# Altium PCB BattBastion_2layer.PcbDoc (part 2 of 2)
Units mm, origin at the board's own origin, x right, y up, seen from the top; angles counter-clockwise.
Board outline 51.31 x 36.45 mm, 2 copper layers (Top Layer, Bottom Layer); 74 components, 42 nets, 277 pads, 438 vias.
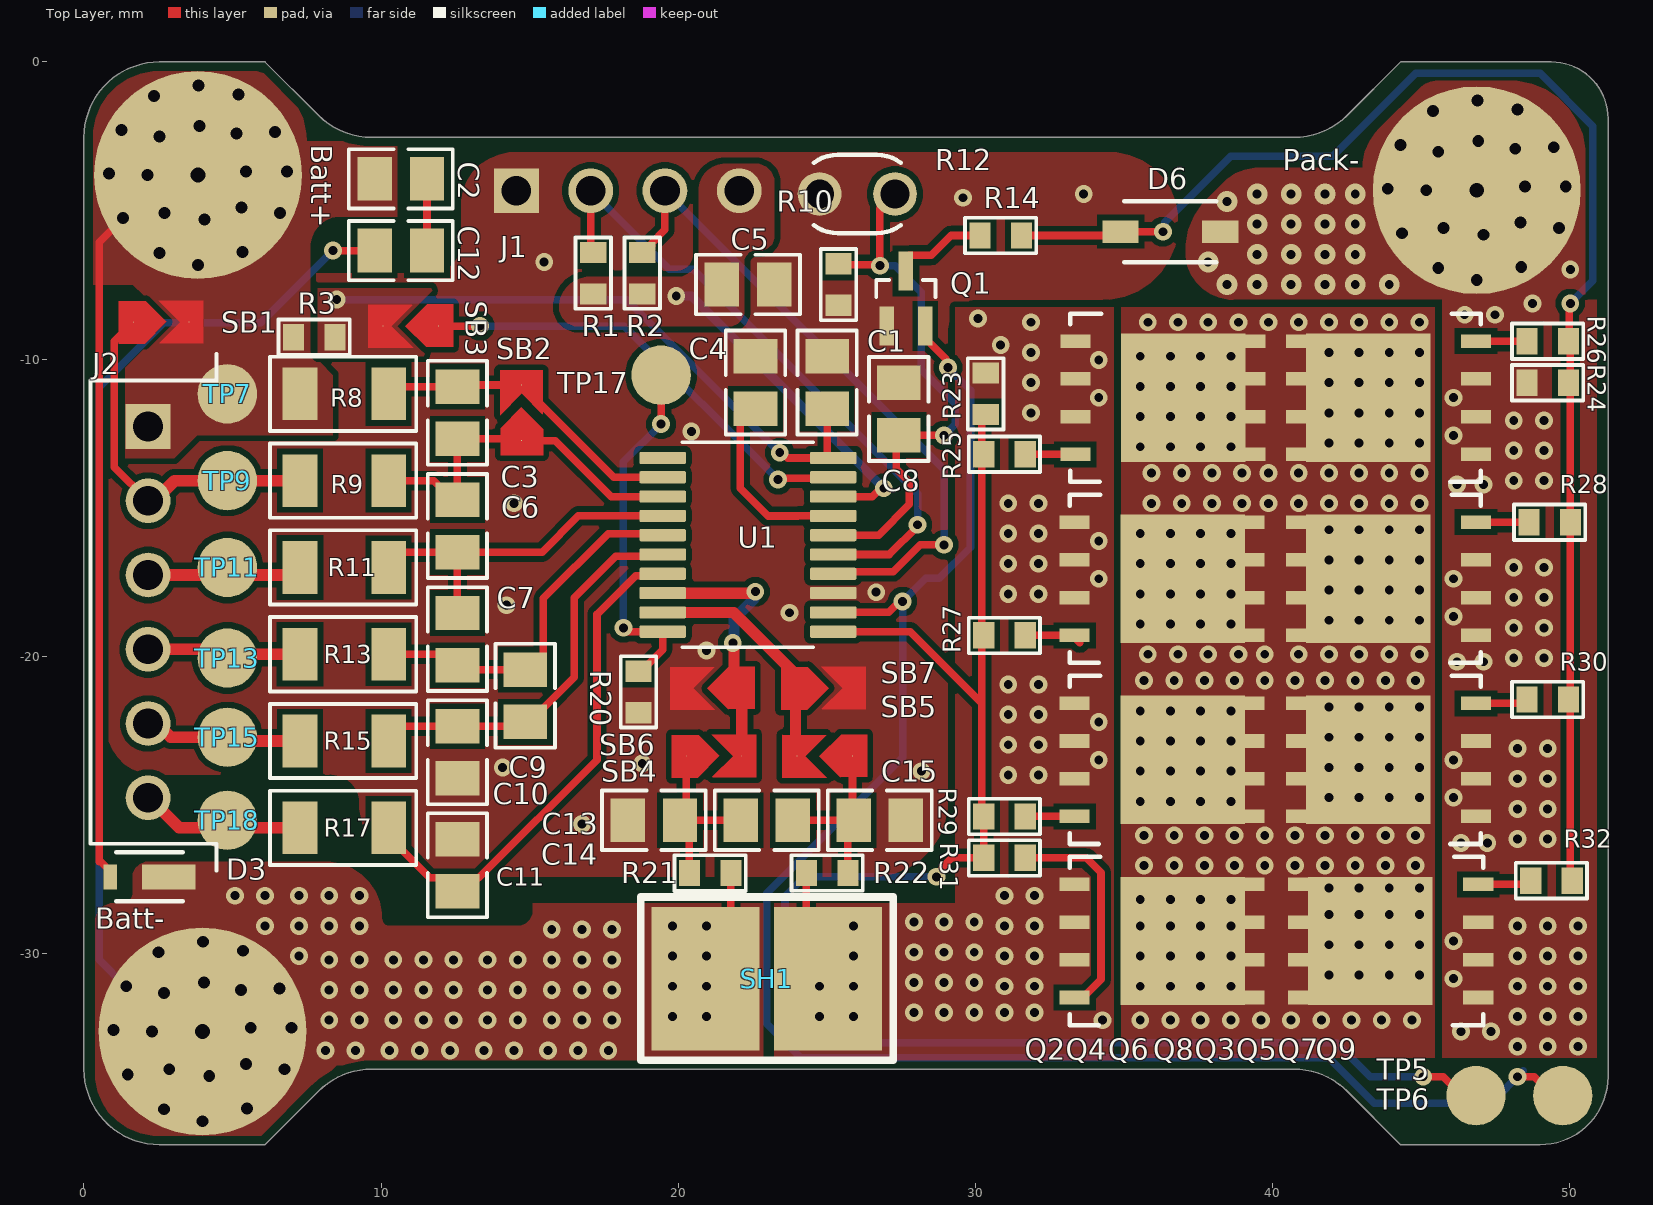
[diagram p0: Top Layer view]

## Part data (continued)
R14: library part "1 kOhms 0603", "Fixed Resistor, Metal Glaze/thick Film, 0.1W, 1000ohm, 75V, 5% +/-Tol, 200ppm/Cel, Surface Mount, 0603", Case/Package=0603, Manufacturer=Bourns, Manufacturer Part Number=CR0603-JW-102ELF, Max Operating Temperature=155°C, Min Operating Temperature=-55°C, Package Height=0.45mm, Package Length=1.6mm, Package Shape=Rectangular, Package Width=0.8mm, Power=100mW, Rated Temperature=70°C, Resistor Type="FIXED RESISTOR", Temperature Coefficient (ppm/Cel)=200, Tolerance=5%, Working Voltage=50V, Category="Chip SMD Resistors", ComponentLink1Description=https://datasheet.ciiva.com:443/pdfs/VipMasterIC/IC/BOUR/BOUR-S-A0009069624/BOUR-S-A0009069624-1.pdf?src-supplier=IHS+Markit, ComponentLink1URL=https://datasheet.ciiva.com:443/pdfs/VipMasterIC/IC/BOUR/BOUR-S-A0009069624/BOUR-S-A0009069624-1.pdf?src-supplier=IHS+Markit, ComponentLink2Description=https://datasheet.ciiva.com/7986/1902866-7986188.pdf?src-supplier=Element14, ComponentLink2URL=https://datasheet.ciiva.com/7986/1902866-7986188.pdf?src-supplier=Element14, ComponentLink3Description=https://datasheet.ciiva.com/46383/691949-46383788.pdf?src-supplier=Element14, ComponentLink3URL=https://datasheet.ciiva.com/46383/691949-46383788.pdf?src-supplier=Element14, ComponentLink4Description=https://datasheet.ciiva.com/16757/70154685-16757477.pdf?src-supplier=Allied+Electronics, ComponentLink4URL=https://datasheet.ciiva.com/16757/70154685-16757477.pdf?src-supplier=Allied+Electronics, ComponentLink5Description=https://datasheet.ciiva.com/9123/chpreztr-9123706.pdf?src-supplier=Avnet, ComponentLink5URL=https://datasheet.ciiva.com/9123/chpreztr-9123706.pdf?src-supplier=Avnet, ComponentLink6Description=https://datasheet.ciiva.com/6564/chpreztr-6564439.pdf?src-supplier=Digikey, ComponentLink6URL=https://datasheet.ciiva.com/6564/chpreztr-6564439.pdf?src-supplier=Digikey, ComponentLink7Description=https://datasheet.ciiva.com/6564/chpreztr-6564441.pdf?src-supplier=Digikey, ComponentLink7URL=https://datasheet.ciiva.com/6564/chpreztr-6564441.pdf?src-supplier=Digikey, Construction=Chip, JESD-609 Code=e3, Mounting Technology="Surface Mount", Packaging="Tape and Reel", Pins=2, Pricing="5000=0.00196, 10000=0.00195, 20000=0.00194, 30000=0.00193, 40000=0.00192 (USD)", Reach SVHC Compliant=Yes, RoHS=Yes, RoHS Compliant=Yes, Stock=15000, Supplier=Avnet, Supplier Part Number=CR0603-JW-102ELF, Technology="RUTHENIUM OXIDE", Terminal Finish=Nickel, Termination=Wraparound
R20: library part "750 kOhms 0603", "Res Thick Film 0603 750K Ohm 1% 1/10W ±100ppm/°C Molded SMD Punched Carrier T/R", Case Code (Imperial)=0603, Manufacturer=Panasonic, Manufacturer Part Number=ERJ-3EKF7503V, Max Operating Temperature=155°C, Max Power Dissipation=100mW, Min Operating Temperature=-55°C, Temperature Coefficient=100ppm/°C, Tolerance=1%, Voltage Rating=75V, Case/Package=0603, Category="Chip SMD Resistors", China RoHS=Non-Compliant, ComponentLink1Description=https://datasheet.octopart.com:443/ERJ3EKF7503V-Panasonic-datasheet-182147282.pdf?src-supplier=IHS, ComponentLink1URL=https://datasheet.octopart.com:443/ERJ3EKF7503V-Panasonic-datasheet-182147282.pdf?src-supplier=IHS, ComponentLink2Description=https://datasheet.octopart.com:443/ERJ-3EKF7503V-Panasonic-datasheet-13266541.pdf?src-supplier=RS+(Formerly+Allied+Electronics), ComponentLink2URL=https://datasheet.octopart.com:443/ERJ-3EKF7503V-Panasonic-datasheet-13266541.pdf?src-supplier=RS+(Formerly+Allied+Electronics), ComponentLink3Description=https://datasheet.octopart.com:443/ERJ-3EKF7503V-Panasonic-datasheet-48891056.pdf?src-supplier=Newark, ComponentLink3URL=https://datasheet.octopart.com:443/ERJ-3EKF7503V-Panasonic-datasheet-48891056.pdf?src-supplier=Newark, ComponentLink4Description=https://datasheet.octopart.com:443/ERJ-3EKF7503V-Panasonic-datasheet-168681906.pdf?src-supplier=Farnell, ComponentLink4URL=https://datasheet.octopart.com:443/ERJ-3EKF7503V-Panasonic-datasheet-168681906.pdf?src-supplier=Farnell, ComponentLink5Description=https://datasheet.octopart.com:443/ERJ-3EKF7503V-Panasonic-datasheet-136608610.pdf?src-supplier=Farnell, ComponentLink5URL=https://datasheet.octopart.com:443/ERJ-3EKF7503V-Panasonic-datasheet-136608610.pdf?src-supplier=Farnell, ComponentLink6Description=https://datasheet.octopart.com:443/ERJ-3EKF7503V-Panasonic---ECG-datasheet-10025800.pdf?src-supplier=Farnell, ComponentLink6URL=https://datasheet.octopart.com:443/ERJ-3EKF7503V-Panasonic---ECG-datasheet-10025800.pdf?src-supplier=Farnell, ComponentLink7Description=https://datasheet.octopart.com:443/ERJ-3EKF7503V-Panasonic---ECG-datasheet-8853621.pdf?src-supplier=Farnell, ComponentLink7URL=https://datasheet.octopart.com:443/ERJ-3EKF7503V-Panasonic---ECG-datasheet-8853621.pdf?src-supplier=Farnell, ComponentLink8Description=https://datasheet.octopart.com:443/ERJ-3EKF7503V-Panasonic---ECG-datasheet-15994758.pdf?src-supplier=Farnell, ComponentLink8URL=https://datasheet.octopart.com:443/ERJ-3EKF7503V-Panasonic---ECG-datasheet-15994758.pdf?src-supplier=Farnell, ComponentLink9Description=https://datasheet.octopart.com:443/ERJ-3EKF7503V-Panasonic-datasheet-5313456.pdf?src-supplier=element14+APAC, ComponentLink9URL=https://datasheet.octopart.com:443/ERJ-3EKF7503V-Panasonic-datasheet-5313456.pdf?src-supplier=element14+APAC, ComponentLink10Description=https://datasheet.octopart.com:443/ERJ-3EKF7503V-Panasonic-datasheet-154766169.pdf?src-supplier=Master+Electronics, ComponentLink10URL=https://datasheet.octopart.com:443/ERJ-3EKF7503V-Panasonic-datasheet-154766169.pdf?src-supplier=Master+Electronics, ComponentLink11Description=https://datasheet.octopart.com:443/ERJ3EKF7503V-Panasonic-datasheet-138819429.pdf?src-supplier=Burklin+Elektronik, ComponentLink11URL=https://datasheet.octopart.com:443/ERJ3EKF7503V-Panasonic-datasheet-138819429.pdf?src-supplier=Burklin+Elektronik, ComponentLink12Description=https://datasheet.octopart.com:443/ERJ-3EKF7503V-Panasonic-datasheet-82288794.pdf?src-supplier=Panasonic+SCT, ComponentLink12URL=https://datasheet.octopart.com:443/ERJ-3EKF7503V-Panasonic-datasheet-82288794.pdf?src-supplier=Panasonic+SCT, ComponentLink13Description=https://datasheet.octopart.com/ERJ-3EKF7503V-Panasonic-datasheet-78375410.pdf, ComponentLink13URL=https://datasheet.octopart.com/ERJ-3EKF7503V-Panasonic-datasheet-78375410.pdf, ComponentLink14Description=https://datasheet.octopart.com:443/ERJ-3EKF7503V-Panasonic-datasheet-118621.pdf?src-supplier=DigiKey, ComponentLink14URL=https://datasheet.octopart.com:443/ERJ-3EKF7503V-Panasonic-datasheet-118621.pdf?src-supplier=DigiKey, ComponentLink15Description=https://datasheet.octopart.com:443/ERJ-3EKF7503V-Panasonic-datasheet-41391857.pdf?src-supplier=Electro+Sonic, ComponentLink15URL=https://datasheet.octopart.com:443/ERJ-3EKF7503V-Panasonic-datasheet-41391857.pdf?src-supplier=Electro+Sonic, ComponentLink16Description=https://datasheet.octopart.com:443/ERJ-3EKF7503V-Panasonic-datasheet-38423196.pdf?src-supplier=Future+Electronics, ComponentLink16URL=https://datasheet.octopart.com:443/ERJ-3EKF7503V-Panasonic-datasheet-38423196.pdf?src-supplier=Future+Electronics, Composition="Thick Film", Contact Plating=Tin, Depth=800µm, Features="Automotive AEC-Q200", Height=450µm, Lead Free="Lead Free", Length=1.6mm, Lifecycle Status=Production, Military Standard=Not, Mounting Technology="Surface Mount", Number of Terminals=2, Number of Terminations=2, Packaging="Cut Tape", Power Dissipation=100mW, Power Rating=100mW, Pricing="1=0.057, 10=0.012, 25=0.012, 100=0.007, 250=0.007, 500=0.006, 1000=0.005, 3000=0.005, 6000=0.004, 15000=0.004, 30000=0.003 (USD)", Radiation Hardening=No, REACH SVHC=Yes, RoHS=Compliant, Schedule B="8533210045, 8533210045|8533210045, 8533210045|8533210045|8533210045, 8533210045|8533210045|8533210045|8533210045", Stock=45236, Supplier="Arrow Electronics", Supplier Part Number=ERJ-3EKF7503V, Termination=SMD/SMT, Width=800µm, Working Voltage=75V
R23 R24: "Res Thick Film 0603 1M Ohm 1% 1/10W ±100ppm/°C Molded SMD Paper T/R", Case Code (Imperial)=0603, Case Code (Metric)=1608, Manufacturer=Yageo, Manufacturer Part Number=RC0603FR-071ML, Max Operating Temperature=155°C, Min Operating Temperature=-55°C, Package Quantity=5000, Power Rating=100mW, Supplier Part Number=2912863, Temperature Coefficient=100ppm/°C, Tolerance=1%, Voltage Rating=75V, Application(s)="HIGH RELIABILITY", Category="Chip SMD Resistors", ComponentLink1Description=https://datasheet.ciiva.com/11819/0900766b80f96399-11819295.pdf?src-supplier=Rs, ComponentLink1URL=https://datasheet.ciiva.com/11819/0900766b80f96399-11819295.pdf?src-supplier=Rs, ComponentLink2Description=https://datasheet.ciiva.com/7983/443971-7983614.pdf?src-supplier=Element14, ComponentLink2URL=https://datasheet.ciiva.com/7983/443971-7983614.pdf?src-supplier=Element14, ComponentLink3Description=https://datasheet.ciiva.com/12555/rc0603-272842-12555388.pdf?src-supplier=Mouser, ComponentLink3URL=https://datasheet.ciiva.com/12555/rc0603-272842-12555388.pdf?src-supplier=Mouser, Diameter=10mm, Height=0.45mm, Lead Free=5697LeadFree, Lead Pitch=5mm, Length=1.6mm, Packaging="Cut Tape", Pricing="5000=0.0009, 50000=0.0008, 150000=0.0008, 375000=0.0008, 1000000=0.0008 (USD)", Radiation Hardening=5898YesNo, RoHS=Yes, RoHS Compliant=Yes, Series=RC, Stock=1005000, Supplier="Future Electronics", Technology="THICK FILM", Termination=SMD/SMT, Type="General Purpose", Weight=0.000847oz, Width=0.8mm
SH1: library part "1mOhms CSR", "Res Metal Strip 2818 0.001 Ohm 1% 10W ±200ppm/C Pad SMD Automotive T/R", Case/Package=2818, Manufacturer=Vishay, Manufacturer Part Number=WSHP28181L000FEB, Max Operating Temperature=170°C, Min Operating Temperature=-65°C, Supplier Part Number=WSHP28181L000FEA, Temperature Coefficient=200ppm/°C, Tolerance=1%, Working Voltage=100mV, Category="Chip SMD Resistors", ComponentLink1Description=https://datasheet.octopart.com:443/WSHP28181L000FEB-Vishay-datasheet-175423646.pdf?src-supplier=IHS, ComponentLink1URL=https://datasheet.octopart.com:443/WSHP28181L000FEB-Vishay-datasheet-175423646.pdf?src-supplier=IHS, ComponentLink2Description=https://datasheet.octopart.com:443/WSHP28181L000FEB-Vishay-datasheet-169394530.pdf?src-supplier=IHS, ComponentLink2URL=https://datasheet.octopart.com:443/WSHP28181L000FEB-Vishay-datasheet-169394530.pdf?src-supplier=IHS, ComponentLink3Description=https://datasheet.octopart.com:443/WSHP28181L000FEA-Vishay-datasheet-104525430.pdf?src-supplier=Upverter, ComponentLink3URL=https://datasheet.octopart.com:443/WSHP28181L000FEA-Vishay-datasheet-104525430.pdf?src-supplier=Upverter, ComponentLink4Description=https://datasheet.octopart.com:443/WSHP28181L000FEB-Vishay-datasheet-76801956.pdf?src-supplier=element14+APAC, ComponentLink4URL=https://datasheet.octopart.com:443/WSHP28181L000FEB-Vishay-datasheet-76801956.pdf?src-supplier=element14+APAC, ComponentLink5Description=http://sigma.octopart.com:80/rohs_statement/Vishay-company-15.pdf?src-supplier=Compliance+Statements, ComponentLink5URL=http://sigma.octopart.com:80/rohs_statement/Vishay-company-15.pdf?src-supplier=Compliance+Statements, Composition="Metal Element", Height=1.5mm, Lifecycle Status=Production, Mounting Technology="Surface Mount", Number of Terminals=2, Packaging=Bulk, Power Dissipation=10W, Power Rating=10W, Pricing="3500=1.04104, 7000=1.00048, 14000=0.95992, 21000=0.91936, 28000=0.90246 (USD)", RoHS=Compliant, Schedule B="8533210045, 8533210045|8533210045|8533210045|8533210045|8533210045|8533210045|8533210045|8533210045|8533210045|8533210045|8533210045|8533210045|8533210045|8533210045|8533210045|8533210045|8533210045|8533210045|8533210045|8533210045|8533210045|8533210045|8533210045|85", Stock=3500, Supplier=Avnet, Width=4.6mm
TP5 TP6 TP17: library part "Test Point"
U1: "3 to 5-Series Cell Li-Ion and Li-Phosphate Battery Monitor (bq76940 Family) 20-TSSOP -40 to 85", Package="TSSOP-20 Texas Instruments", Availability=Warning, Check_prices=https://www.snapeda.com/parts/BQ7692000PW/Texas%20Instruments/view-part/533751/?ref=eda, MF="Texas Instruments", MP=BQ7692000PW, Price=None, Purchase-URL=https://pricing.snapeda.com/search/part/BQ7692000PW/?ref=eda, SnapEDA_Link=https://www.snapeda.com/parts/BQ7692000PW/Texas%20Instruments/view-part/533751/?ref=snap

## Via types
v1: diameter 0.6, hole 0.3, Top Layer to Bottom Layer, 321 vias
v2: diameter 0.6, hole 0.3, Top Layer to Bottom Layer, tented both sides, 94 vias
v3: diameter 0.7, hole 0.3, Top Layer to Bottom Layer, 20 vias
v4: diameter 0.6, hole 0.3, Top Layer to Bottom Layer, tented bottom, 3 vias

## Nets (pads, with @x,y where several pads share a name; then routed paths per layer and width w, separated by ;. In a path a pad name is that pad's centre, name@x,y a point inside that pad or via, vN(x,y) a via of type N, cw(c..) or ccw(c..) an arc to the next point about the centre after c; other vN are vias at no path point)
ALERT: R20.1 TP17.1 U1.20 | length 12.1
  Top Layer w0.254: v2(18.161,-19.05) 18.292,-19.181 U1.20 19.482,-19.786 18.758,-20.511 R20.1 ; v2(19.431,-12.192) TP17.1
  Bottom Layer w0.254: v2(18.161,-19.05) 18.161,-13.462 v2(19.431,-12.192)
Batt-: Batt-.1 C12.1 D3.2 R21.1 SH1.1 | length 38.9
  Top Layer w0.254: v2(8.382,-6.35) C12.1 ; SH1.1 21.78,-30.01 R21.1
  Bottom Layer w0.254: Batt-.1@3.988,-32.639 2.921,-32.639 1.41,-31.128 0.508,-30.226 0.508,-10.944 2.679,-8.773 5.959,-8.773 v2(8.382,-6.35)
  other v1: 8.128,-33.274 9.144,-33.274 10.287,-33.274 11.303,-33.274 12.319,-33.274 13.462,-33.274 14.478,-33.274 15.621,-33.274 16.637,-33.274 17.653,-33.274 8.255,-32.258 9.271,-32.258 10.414,-32.258 11.43,-32.258 12.446,-32.258 13.589,-32.258 14.605,-32.258 15.748,-32.258 16.764,-32.258 17.78,-32.258 19.812,-32.131 20.955,-32.131 8.255,-31.242 9.271,-31.242 10.414,-31.242 11.43,-31.242 12.446,-31.242 13.589,-31.242 14.605,-31.242 15.748,-31.242 16.764,-31.242 17.78,-31.242 19.812,-31.115 20.955,-31.115 8.255,-30.226 9.271,-30.226 10.414,-30.226 11.43,-30.226 12.446,-30.226 13.589,-30.226 14.605,-30.226 15.748,-30.226 16.764,-30.226 17.78,-30.226 7.239,-30.099 19.812,-30.099 20.955,-30.099 15.748,-29.21 16.764,-29.21 17.78,-29.21 6.096,-29.083 7.239,-29.083 8.255,-29.083 9.271,-29.083 19.812,-29.083 20.955,-29.083 5.08,-28.067 6.096,-28.067 7.239,-28.067 8.255,-28.067 9.271,-28.067
GND: C1.1 C4.1 C5.1 C8.2 C10.1 C11.1 C13.1 C15.2 J1.1 Q1.1 R10.2 R12.2 R20.2 SB6.2 SB7.2 U1.3
  other v2: 16.764,-25.654 28.194,-23.876 14.097,-23.749 18.796,-23.622 20.955,-19.812 23.749,-18.542 14.224,-18.288 26.67,-17.85 14.478,-14.859 20.447,-12.446 15.494,-6.731 29.591,-4.572 33.655,-4.445
NetBatt+_1: Batt+.1 C2.2 D3.1 J2.1 R3.1 R8.1 SB1.2 TP7.1 | length 22.7
  Top Layer w0.254: D3.1 0.889,-27.241 0.572,-26.924 0.508,-26.924 0.508,-6.071 Batt+.1@1.321,-5.258
NetC1_2: C1.2 R3.2 SB3.2 U1.10 | length 21.1
  Top Layer w0.254: 9.687,-9.271 SB3.2 ; v2(23.423,-13.153) 23.516,-13.153 23.696,-13.333 25.22,-13.333 U1.10 ; C1.2 25.019,-13.253 U1.10@25.097,-13.331
  Bottom Layer w0.254: v2(8.509,-8.001) 18.27,-8.001 v2(23.423,-13.153)
NetC2_1: C2.1 C12.2 | length 2.4
  Top Layer w0.254: C12.2 C2.1
NetC3_1: C3.1 C6.2 R9.2 SB2.1 U1.13 | length 12.3
  Top Layer w0.254: R9.2 11.774,-14.097 12.418,-14.741 C6.2 C3.1 14.677,-12.691 SB2.1 15.868,-12.746 17.753,-14.631 U1.13
NetC3_2: C3.2 R8.2 SB2.2 U1.12 | length 10.6
  Top Layer w0.254: R8.2 10.502,-10.931 C3.2 12.628,-10.876 SB2.2 17.837,-13.981 U1.12
NetC4_2: C4.2 U1.7 | length 6.4
  Top Layer w0.254: C4.2 22.551,-11.675 22.098,-12.128 22.098,-14.351 23.033,-15.286 24.031,-15.286 24.036,-15.281 U1.7
NetC6_1: C6.1 C7.2 R11.2 U1.14 | length 12
  Top Layer w0.254: R11.2 10.257,-16.959 10.715,-16.501 C6.1 ; C7.2 C6.1 ; U1.14 16.645,-15.281 15.425,-16.501 C6.1
NetC7_1: C7.1 C9.2 R13.2 U1.15 | length 12.5
  Top Layer w0.254: R13.2 12.201,-19.939 12.718,-20.456 C9.2 15.014,-20.456 15.467,-20.003 15.467,-18.061 17.651,-15.877 19.428,-15.877 U1.15
NetC9_1: C9.1 C10.2 R15.2 U1.16 | length 13.4
  Top Layer w0.254: R15.2 10.257,-22.819 10.715,-22.361 C10.2 14.714,-22.361 C9.1 15.014,-22.216 16.51,-20.72 16.51,-18.034 17.899,-16.645 19.418,-16.645 U1.16
NetC11_2: C11.2 R17.2 U1.17 | length 17.6
  Top Layer w0.254: R17.2 10.257,-26.081 11.645,-27.469 12.12,-27.469 C11.2 13.026,-27.469 13.298,-27.469 17.272,-23.495 17.272,-18.592 18.569,-17.295 19.418,-17.295 U1.17
NetC13_2: C13.2 C14.1 R21.2 SB4.1 | length 6.2
  Top Layer w0.254: SB4.1 20.274,-25.319 C13.2 ; R21.2 20.383,-25.845 C13.2 ; C14.1 C13.2
NetC14_2: C14.2 C15.1 R22.2 SB5.1 | length 6.1
  Top Layer w0.254: C14.2 C15.1 ; R22.2 25.717,-25.717 C15.1 ; SB5.1 25.873,-25.492 C15.1
NetD6_1: D6.1 R14.2 R24.1 R26.1 R28.1 R30.1 R32.1 | length 47.6
  Top Layer w0.254: R14.2 D6.1@34.392,-5.842 ; D6.1 v4(36.322,-5.715) ; v1(50.038,-8.128) 50.006,-8.16 50.006,-9.366 R26.1 50.038,-9.461 R28.1 50.038,-27.495 R32.1
  Bottom Layer w0.254: v4(36.322,-5.715) 36.388,-5.649 36.388,-5.395 38.608,-3.175 42.037,-3.175 43.449,-1.763 44.831,-0.381 49.022,-0.381 50.8,-2.159 50.8,-7.366 v1(50.038,-8.128)
NetD6_2: D6.2 Pack-.1 Q3.3 Q5.3 Q7.3 Q9.3 R24.2
  other v1: 48.26,-33.147 49.276,-33.147 50.292,-33.147 46.355,-32.639 47.371,-32.639 48.26,-32.131 49.276,-32.131 50.292,-32.131 48.26,-31.115 49.276,-31.115 50.292,-31.115 46.101,-30.861 48.26,-30.099 49.276,-30.099 50.292,-30.099 46.101,-29.591 48.26,-29.083 49.276,-29.083 50.292,-29.083 46.355,-26.289 47.244,-26.289 48.26,-26.162 49.276,-26.162 48.26,-25.146 49.276,-25.146 46.101,-24.765 48.26,-24.13 49.276,-24.13 46.101,-23.495 48.26,-23.114 49.276,-23.114 46.228,-20.193 47.117,-20.193 48.133,-20.066 49.149,-20.066 48.133,-19.05 49.149,-19.05 46.101,-18.669 48.133,-18.034 49.149,-18.034 46.101,-17.399 48.133,-17.018 49.149,-17.018 46.228,-14.224 47.117,-14.224 48.133,-14.097 49.149,-14.097 48.133,-13.081 49.149,-13.081 46.101,-12.573 48.133,-12.065 49.149,-12.065 46.101,-11.303 46.482,-8.509 47.498,-8.509 48.768,-8.128 50.038,-6.985
  other v3: 38.481,-7.493 39.497,-7.493 40.64,-7.493 41.783,-7.493 42.799,-7.493 43.942,-7.493 37.846,-6.731 39.497,-6.477 40.64,-6.477 41.783,-6.477 42.799,-6.477 39.497,-5.461 40.64,-5.461 41.783,-5.461 42.799,-5.461 38.481,-4.699 39.497,-4.445 40.64,-4.445 41.783,-4.445 42.799,-4.445
NetJ2_2: J2.2 R9.1 SB1.1 TP9.1 | length 12.1
  Top Layer w0.254: SB1.1 1.024,-9.397 1.024,-13.637 J2.2
  Top Layer w0.4: J2.2 2.373,-14.772 3.048,-14.097 TP9.1 R9.1
NetJ2_3: J2.3 R11.1 TP11.1 | length 5.4
  Top Layer w0.4: J2.3 4.572,-17.272 4.699,-17.145 TP11.1 5.08,-17.272 7.015,-17.272 R11.1
NetJ2_4: J2.4 R13.1 TP13.1 | length 5.3
  Top Layer w0.4: J2.4 4.532,-19.772 TP13.1 4.953,-19.939 R13.1
NetJ2_5: J2.5 R15.1 TP15.1 | length 5.4
  Top Layer w0.4: J2.5 2.459,-22.272 2.92,-22.733 TP15.1 4.953,-22.86 R15.1
NetJ2_6: J2.6 R17.1 TP18.1 | length 5.7
  Top Layer w0.4: J2.6 2.192,-24.772 3.201,-25.781 4.572,-25.781 TP18.1 4.953,-25.654 5.08,-25.781 R17.1
NetQ1_2: Q1.2 TP6.1 U1.2 | length 59.2
  Top Layer w0.254: U1.2 27.095,-18.531 27.465,-18.161 v2(27.559,-18.161) ; Q1.2 28.321,-9.3 29.017,-9.996 29.017,-10.221 v2(29.083,-10.287) ; v4(48.26,-34.163) 48.829,-34.163 49.21,-34.544 TP6.1@50.579,-34.544
  Bottom Layer w0.254: v2(29.083,-10.287) 29.845,-11.049 29.845,-16.33 28.795,-17.38 28.34,-17.38 v2(27.559,-18.161) 27.559,-23.412 22.987,-27.984 22.987,-32.385 24.13,-33.528 41.91,-33.528 43.434,-35.052 47.371,-35.052 v4@48.459,-33.964
NetQ1_3: Q1.3 R14.1 | length 3.2
  Top Layer w0.254: Q1.3 27.671,-6.63 27.789,-6.512 28.526,-6.512 29.196,-5.842 R14.1
NetQ2_1: Q2.1 R25.1 | length 1.7
  Top Layer w0.254: R25.1 Q2.1
NetQ2_2: Q2.2 Q3.2 Q4.2 Q5.2 Q6.2 Q7.2 Q8.2 Q9.2
  other v1: 35.56,-32.258 36.576,-32.258 37.592,-32.258 38.608,-32.258 39.624,-32.258 40.64,-32.258 41.656,-32.258 42.672,-32.258 35.56,-31.115 36.576,-31.115 37.592,-31.115 38.608,-31.115 41.91,-30.734 42.926,-30.734 35.56,-30.099 36.576,-30.099 37.592,-30.099 38.608,-30.099 41.91,-29.718 42.926,-29.718 35.56,-29.083 36.576,-29.083 37.592,-29.083 38.608,-29.083 41.91,-28.702 42.926,-28.702 35.56,-28.194 36.576,-28.194 37.592,-28.194 38.608,-28.194 41.91,-27.813 42.926,-27.813 35.687,-27.051 36.703,-27.051 37.719,-27.051 38.735,-27.051 39.751,-27.051 40.767,-27.051 41.783,-27.051 42.799,-27.051 35.687,-26.035 36.703,-26.035 37.719,-26.035 38.735,-26.035 39.751,-26.035 40.767,-26.035 41.783,-26.035 42.799,-26.035 35.56,-24.892 36.576,-24.892 37.592,-24.892 38.608,-24.892 41.91,-24.765 42.926,-24.765 35.56,-23.876 36.576,-23.876 37.592,-23.876 38.608,-23.876 41.91,-23.749 42.926,-23.749 35.56,-22.86 36.576,-22.86 37.592,-22.86 38.608,-22.86 41.91,-22.733 42.926,-22.733 35.56,-21.844 36.576,-21.844 37.592,-21.844 38.608,-21.844 41.91,-21.717 42.926,-21.717 35.687,-20.828 36.703,-20.828 37.719,-20.828 38.735,-20.828 39.751,-20.828 40.767,-20.828 41.783,-20.828 42.799,-20.828 35.814,-19.939 36.83,-19.939 37.846,-19.939 38.862,-19.939 39.751,-19.939 40.894,-19.939 41.91,-19.939 42.926,-19.939 35.56,-18.923 36.576,-18.923 37.592,-18.923 38.608,-18.923 41.91,-18.796 42.926,-18.796 35.56,-17.907 36.576,-17.907 37.592,-17.907 38.608,-17.907 41.91,-17.78 42.926,-17.78 35.56,-16.891 36.576,-16.891 37.592,-16.891 38.608,-16.891 41.91,-16.764 42.926,-16.764 35.56,-15.875 36.576,-15.875 37.592,-15.875 38.608,-15.875 41.91,-15.748 42.926,-15.748 35.941,-14.859 36.957,-14.859 37.973,-14.859 38.989,-14.859 39.878,-14.859 40.894,-14.859 41.91,-14.859 42.926,-14.859 35.941,-13.843 36.957,-13.843 37.973,-13.843 38.989,-13.843 39.878,-13.843 40.894,-13.843 41.91,-13.843 42.926,-13.843 35.56,-12.954 36.576,-12.954 37.592,-12.954 38.608,-12.954 41.91,-12.827 42.926,-12.827 35.56,-11.938 36.576,-11.938 37.592,-11.938 38.608,-11.938 41.91,-11.811 42.926,-11.811 35.56,-10.922 36.576,-10.922 37.592,-10.922 38.608,-10.922 41.91,-10.795 42.926,-10.795 35.56,-9.906 36.576,-9.906 37.592,-9.906 38.608,-9.906 41.91,-9.779 42.926,-9.779
  other v2: 43.688,-32.258 44.704,-32.258 43.942,-30.734 44.958,-30.734 43.942,-29.718 44.958,-29.718 43.942,-28.702 44.958,-28.702 43.942,-27.813 44.958,-27.813 43.815,-27.051 44.831,-27.051 43.815,-26.035 44.831,-26.035 43.942,-24.765 44.958,-24.765 43.942,-23.749 44.958,-23.749 43.942,-22.733 44.958,-22.733 43.942,-21.717 44.958,-21.717 43.815,-20.828 44.831,-20.828 43.942,-19.939 44.958,-19.939 43.942,-18.796 44.958,-18.796 43.942,-17.78 44.958,-17.78 43.942,-16.764 44.958,-16.764 43.942,-15.748 44.958,-15.748 43.942,-14.859 44.958,-14.859 43.942,-13.843 44.958,-13.843 43.942,-12.827 44.958,-12.827 43.942,-11.811 44.958,-11.811 43.942,-10.795 44.958,-10.795 43.942,-9.779 44.958,-9.779 35.814,-8.763 36.83,-8.763 37.846,-8.763 38.862,-8.763 39.878,-8.763 40.894,-8.763 41.91,-8.763 42.926,-8.763 43.942,-8.763 44.958,-8.763
NetQ2_3: Q2.3 Q4.3 Q6.3 Q8.3 R22.1 R23.1 SH1.2 | length 3.9
  Top Layer w0.254: R22.1 24.32,-30.137 SH1.2
  other v1: 24.765,-32.131 25.908,-32.131 27.94,-32.004 28.956,-32.004 29.972,-32.004 30.988,-32.004 32.004,-32.004 24.765,-31.115 25.908,-31.115 30.988,-31.115 32.004,-31.115 27.94,-30.988 28.956,-30.988 29.972,-30.988 25.908,-30.099 30.988,-30.099 32.004,-30.099 27.94,-29.972 28.956,-29.972 29.972,-29.972 25.908,-29.083 30.988,-29.083 32.004,-29.083 27.94,-28.956 28.956,-28.956 29.972,-28.956 30.988,-28.067 32.004,-28.067 31.115,-24.003 32.131,-24.003 31.115,-22.987 32.131,-22.987 31.115,-21.971 32.131,-21.971 31.115,-20.955 32.131,-20.955 31.115,-17.907 32.131,-17.907 31.115,-16.891 32.131,-16.891 31.115,-15.875 32.131,-15.875 31.115,-14.859 32.131,-14.859 31.877,-11.811 31.877,-10.795 31.877,-9.779 30.861,-9.525 31.877,-8.763 30.099,-8.636
  other v2: 34.29,-32.258 34.163,-23.495 34.163,-22.225 34.163,-17.399 34.163,-16.129 34.163,-11.303 34.163,-10.033
NetQ3_1: Q3.1 R26.2 | length 1.7
  Top Layer w0.254: Q3.1 R26.2
NetQ4_1: Q4.1 R27.1 | length 1.9
  Top Layer w0.254: R27.1 33.274,-19.304 33.528,-19.558
NetQ5_1: Q5.1 R28.2 | length 1.8
  Top Layer w0.254: Q5.1 R28.2
NetQ6_1: Q6.1 R29.1 | length 1.7
  Top Layer w0.254: R29.1 Q6.1
NetQ7_1: Q7.1 R30.2 | length 1.8
  Top Layer w0.254: Q7.1 48.451,-21.59 R30.2
NetQ8_1: Q8.1 R31.1 | length 7.5
  Top Layer w0.254: R31.1 33.737,-26.797 34.239,-27.3 34.239,-30.886 33.63,-31.496 Q8.1
NetQ9_1: Q9.1 R32.2 | length 1.8
  Top Layer w0.254: Q9.1 48.578,-27.686 R32.2
NetR23_2: R23.2 R25.2 R27.2 R29.2 R31.2 TP5.1 U1.1 | length 56.7
  Top Layer w0.254: U1.1 27.817,-19.181 30.226,-21.59 ; v2(28.702,-27.432) 28.702,-27.338 29.03,-27.01 29.03,-26.977 29.21,-26.797 R31.2 30.29,-25.527 R29.2@30.226,-25.463 ; R29.2@30.226,-25.4 30.226,-21.59 ; R23.2 30.226,-12.002 30.226,-21.59 ; v4(45.085,-34.163) 45.766,-34.163 46.401,-34.798 TP5.1
  Bottom Layer w0.254: v2(28.702,-27.432) 24.257,-27.432 23.6,-28.089 23.6,-32.236 24.384,-33.02 42.164,-33.02 43.307,-34.163 v4(45.085,-34.163)
NetSB3_1: SB3.1 U1.9 | length 15.5
  Top Layer w0.254: SB3.1 v2(13.335,-8.89) ; v2(23.368,-14.062) 23.408,-14.022 25.181,-14.022 U1.9
  Bottom Layer w0.254: v2(13.335,-8.89) 18.196,-8.89 v2(23.368,-14.062)
REGOUT: C5.2 J1.4 R1.2 R2.2 U1.8 | length 11.5
  Top Layer w0.254: U1.8 25.235,-14.644 26.537,-14.644 26.83,-14.351 v2(26.924,-14.351)
  Bottom Layer w0.3: v2(19.939,-7.874) 20.447,-7.874 20.643,-8.07 v2(26.924,-14.351)
SCL: J1.2 R1.1 U1.5 | length 21.7
  Top Layer w0.254: J1.2 17.058,-6.326 R1.1 ; U1.5 27.107,-16.581 28.062,-15.626 v2(28.062,-15.581)
  Bottom Layer w0.254: J1.2 19.704,-6.979 20.515,-6.979 28.067,-14.531 28.067,-15.576 v2(28.062,-15.581)
SDA: J1.3 R2.1 U1.4 | length 22.4
  Top Layer w0.254: R2.1 18.885,-6.413 19.113,-6.185 19.113,-6.096 19.558,-5.651 J1.3 ; U1.4 25.286,-17.167 27.239,-17.167 28.15,-16.256 v2(28.956,-16.256)
  Bottom Layer w0.254: J1.3 28.956,-13.731 v2(28.956,-16.256)
SR_N: SB5.2 SB7.1 U1.19 | length 8.1
  Top Layer w0.381: U1.19 21.877,-18.531 23.957,-20.611 SB7.1 23.957,-23.322 SB5.2
SR_P: SB4.2 SB6.1 U1.18 | length 9.1
  Top Layer w0.381: U1.18 22.399,-17.881 22.404,-17.875 22.559,-17.875 v2(22.601,-17.833) ; v2(21.844,-19.558) 21.886,-19.6 21.886,-20.421 22.098,-20.633 SB6.1 22.144,-21.128 SB4.2
  Bottom Layer w0.381: v2(21.844,-19.558) 21.886,-19.516 21.886,-18.754 22.559,-18.081 22.559,-17.875 v2(22.601,-17.833)
TS1: C8.1 R10.1 R12.1 U1.6 | length 18.4
  Top Layer w0.254: U1.6 26.748,-15.931 27.785,-14.895 27.785,-14.132 27.351,-13.698 27.351,-12.645 C8.1 27.441,-12.573 v2(28.956,-12.573) ; R10.1 25.432,-6.826 26.765,-6.826 v2(26.797,-6.858) 26.797,-4.953 cw(c27.305,-4.953) R12.1
  Bottom Layer w0.254: v2(26.797,-6.858) 27.305,-6.858 28.194,-7.747 28.194,-10.361 29.337,-11.504 29.337,-12.192 v2(28.956,-12.573)
pads on no net: U1.11

## Polygon pours and split planes (outlines as drawn)
Batt- on Top Layer "NONET_L-01_P-001" (solid, pour order 23): 22.86,-28.321 22.86,-33.782 8.509,-33.782 6.096,-36.195 2.54,-36.195 cw(c2.54,-34.036) 0.381,-34.036 0.381,-28.956 cw(c1.016,-28.956) 1.016,-28.321 1.27,-28.321 ccw(c1.27,-27.94) 1.651,-27.94 1.651,-27.432 cw(c2.159,-27.432) 2.159,-26.924 8.128,-26.924 cw(c8.128,-28.829) 10.033,-28.829 ccw(c10.287,-28.829) 10.287,-29.083 14.605,-29.083 ccw(c14.605,-28.575) 15.113,-28.575 15.113,-28.321
NetQ2_3 on Top Layer "NONET_L-01_P-001" (solid, pour order 15): 29.337,-28.321 23.241,-28.321 23.241,-33.655 30.353,-33.655 34.671,-33.655 34.671,-8.255 29.337,-8.255
NetD6_2 on Top Layer "NONET_L-01_P-001" (solid, pour order 14): 37.084,-6.386 ccw(c38.699,-6.386) 38.699,-8.001 45.72,-8.001 45.72,-33.528 50.927,-33.528 50.927,-8.001 50.546,-8.001 50.546,-3.175 ccw(c48.006,-3.175) 48.006,-0.635 45.571,-0.635 ccw(c45.571,-1.502) 44.958,-0.889 43.592,-2.255 ccw(c44.893,-3.556) 43.053,-3.556 39.58,-3.556 ccw(c39.58,-5.29) 38.354,-4.064 37.828,-4.59 ccw(c39.624,-6.386)
NetQ2_2 on Top Layer "NONET_L-01_P-001" (solid, pour order 17): 34.925,-8.255 34.925,-33.528 45.466,-33.528 45.466,-8.255
GND on Top Layer "NONET_L-01_P-001" (solid, pour order 25): 34.544,-3.048 cw(c34.544,-5.334) 36.83,-5.334 36.83,-5.461 cw(c34.29,-5.461) 34.29,-8.001 30.099,-8.001 ccw(c30.099,-9.017) 29.083,-9.017 29.083,-11.049 29.083,-24.892 cw(c26.543,-24.892) 26.543,-27.432 11.811,-27.432 cw(c11.811,-24.892) 9.271,-24.892 ccw(c8.319,-24.956) 8.255,-24.003 2.413,-24.003 cw(c2.413,-22.352) 0.762,-22.352 0.762,-8.636 cw(c2.286,-8.636) 2.286,-7.112 11.686,-7.112 ccw(c11.684,-6.096) 12.7,-6.096 12.7,-4.445 12.7,-4.826 cw(c14.478,-4.826) 14.478,-3.048
NetBatt+_1 on Top Layer "NONET_L-01_P-001" (solid, pour order 22): 0.127,-2.667 cw(c2.667,-2.667) 2.667,-0.127 4.826,-0.127 cw(c4.89,-2.73) 7.493,-2.667 10.541,-2.667 10.541,-5.207 8.636,-5.207 ccw(c8.636,-6.223) 7.62,-6.223 7.62,-9.779 8.382,-10.541 8.382,-12.573 3.81,-12.573 3.048,-13.335 1.397,-13.335 1.397,-10.287 2.921,-8.763 1.651,-7.493 0.254,-7.493 cw(c0.254,-7.366) 0.127,-7.366 0.127,-3.683
REGOUT on Top Layer "NONET_L-01_P-001" (solid, pour order 9): 20.701,-4.318 cw(c21.59,-4.318) 21.59,-3.429 22.606,-3.429 cw(c22.606,-4.064) 23.241,-4.064 23.241,-5.842 cw(c22.733,-5.842) 22.733,-6.35 22.606,-6.35 ccw(c22.606,-6.731) 22.225,-6.731 22.225,-8.382 cw(c21.717,-8.382) 21.717,-8.89 16.637,-8.89 cw(c16.637,-8.255) 16.002,-8.255 cw(c17.018,-8.255) 17.018,-7.239 19.939,-7.239 ccw(c19.939,-6.477) 20.701,-6.477 20.701,-4.699
NetC1_2 on Top Layer "NONET_L-01_P-001" (solid, pour order 8): 7.874,-7.62 7.874,-9.906 8.763,-9.906 11.557,-9.906 10.541,-8.89 11.811,-7.62 10.668,-7.62
NetQ2_2 on Bottom Layer "NONET_L-01_P-001" (solid, pour order 18): 34.92,-9.398 34.92,-33.655 43.942,-33.655 43.942,-9.398
GND on Bottom Layer "NONET_L-01_P-001" (solid, pour order 24): 11.686,-7.112 2.286,-7.112 ccw(c2.286,-8.636) 0.762,-8.636 0.762,-22.352 ccw(c2.413,-22.352) 2.413,-24.003 8.255,-24.003 cw(c8.319,-24.956) 9.271,-24.892 ccw(c11.811,-24.892) 11.811,-27.432 26.543,-27.432 ccw(c26.543,-24.892) 29.083,-24.892 29.083,-5.588 ccw(c26.543,-5.588) 26.543,-3.048 14.478,-3.048 ccw(c14.478,-4.826) 12.7,-4.826 12.7,-4.445 12.7,-6.096 cw(c11.684,-6.096)
NetQ2_3 on Bottom Layer "NONET_L-01_P-001" (solid, pour order 13): 29.718,-28.067 24.13,-28.067 24.13,-32.258 24.511,-32.639 24.518,-32.632 29.718,-32.632 29.718,-33.655 33.401,-33.655 33.401,-5.207 29.718,-5.207
Batt- on Bottom Layer "NONET_L-01_P-001" (solid, pour order 26): 22.352,-28.321 22.352,-33.782 8.509,-33.782 6.096,-36.195 2.54,-36.195 cw(c2.54,-34.036) 0.381,-34.036 0.381,-28.956 cw(c1.016,-28.956) 1.016,-28.321 1.27,-28.321 ccw(c1.27,-27.94) 1.651,-27.94 1.651,-27.432 cw(c2.159,-27.432) 2.159,-26.924 8.128,-26.924 cw(c8.128,-28.829) 10.033,-28.829 ccw(c10.287,-28.829) 10.287,-29.083 14.605,-29.083 ccw(c14.605,-28.575) 15.113,-28.575 15.113,-28.321
NetD6_2 on Bottom Layer "NONET_L-01_P-001" (solid, pour order 21): 37.084,-6.386 ccw(c38.699,-6.386) 38.699,-8.001 45.72,-8.001 45.72,-33.528 50.927,-33.528 50.927,-8.001 50.546,-8.001 50.546,-3.175 ccw(c48.006,-3.175) 48.006,-0.635 45.571,-0.635 ccw(c45.571,-1.502) 44.958,-0.889 43.592,-2.255 ccw(c44.893,-3.556) 43.053,-3.556 39.58,-3.556 ccw(c39.58,-5.29) 38.354,-4.064 37.828,-4.59 ccw(c39.624,-6.386)
Batt- on Bottom Solder "NONET_L-01_P-001" (solid): 22.352,-28.321 22.352,-33.782 8.509,-33.782 6.096,-36.195 2.54,-36.195 cw(c2.54,-34.036) 0.381,-34.036 0.381,-28.956 cw(c1.016,-28.956) 1.016,-28.321 1.27,-28.321 ccw(c1.27,-27.94) 1.651,-27.94 1.651,-27.432 cw(c2.159,-27.432) 2.159,-26.924 8.128,-26.924 cw(c8.128,-28.829) 10.033,-28.829 ccw(c10.287,-28.829) 10.287,-29.083 14.605,-29.083 ccw(c14.605,-28.575) 15.113,-28.575 15.113,-28.321
NetD6_2 on Bottom Solder "NONET_L-01_P-001" (solid): 37.084,-6.386 ccw(c38.699,-6.386) 38.699,-8.001 45.72,-8.001 45.72,-33.528 50.927,-33.528 50.927,-8.001 50.546,-8.001 50.546,-3.175 ccw(c48.006,-3.175) 48.006,-0.635 45.571,-0.635 ccw(c45.571,-1.502) 44.958,-0.889 43.592,-2.255 ccw(c44.893,-3.556) 43.053,-3.556 39.58,-3.556 ccw(c39.58,-5.29) 38.354,-4.064 37.828,-4.59 ccw(c39.624,-6.386)
NetQ2_2 on Bottom Solder "NONET_L-01_P-001" (solid): 34.92,-9.398 34.92,-33.655 43.942,-33.655 43.942,-9.398
NetQ2_3 on Bottom Solder "NONET_L-01_P-001" (solid): 29.718,-28.067 24.13,-28.067 24.13,-32.258 24.511,-32.639 24.518,-32.632 29.718,-32.632 29.718,-33.655 33.401,-33.655 33.401,-5.207 29.718,-5.207

## Text inside footprints (layer, text, board x,y; h text height)
D3: Mechanical 13 "*" at 1.156,-28.067 h1.27
D6: Mechanical 13 "*" at 35.09,-6.35 h1.27